# EAGLE board mrShark 02.a (EAGLE 5.10)
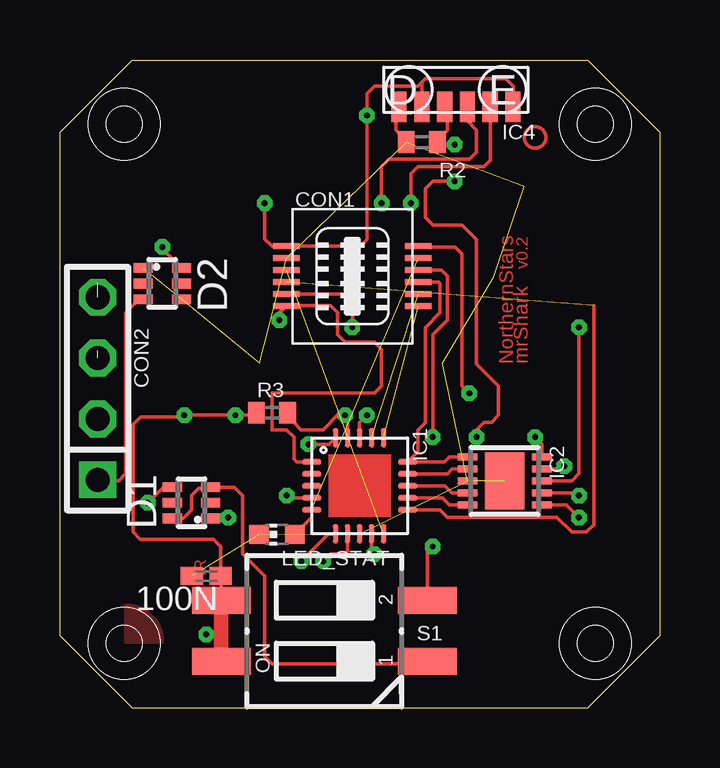
[diagram p0: board, top side]
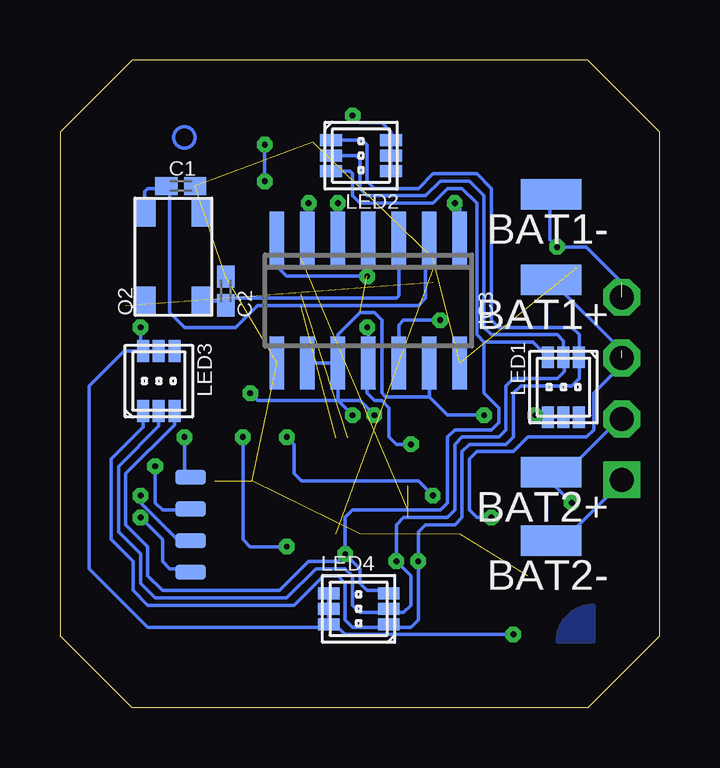
[diagram p1: board, bottom side, seen from below]

Size 25 x 27 mm. Coordinates in mm from the lower left corner, seen from the top.
Outline: 3,0 22,0 25,3 25,24 22,27 3,27 0,24 0,3 3,0
Copper layers (1*16): Top 0.035mm / dielectric 1.5mm / Bottom 0.035mm
Design rules "default": minimum track width 10mil, minimum drill 24mil, track to track 8mil, track to pad 8mil, pad to pad 8mil, via to via 8mil, smd to smd 8mil, copper to edge 40mil, drill to drill 8mil, minimum pad ring 10mil, minimum via ring 8mil, stop-mask expansion 4mil, vias tented up to drill 0mil, thermal gap 10mil

## Footprints (pad centres in the part's own frame; a part is rotated, then mirrored left to right if it is on the bottom)
C0402K = smd 0.925 x 0.74: 1 -0.6,0; 2 0.6,0
SMD1,27-2,54 = smd 1.27 x 2.54: 1 0,0
DF23C-12DS = smd 0.25 x 1.1: 1 -1.25,-2.75; 2 -0.75,-2.75; 3 -0.25,-2.75; 4 0.25,-2.75; 5 0.75,-2.75; 6 1.25,-2.75; 7 1.25,2.75; 8 0.75,2.75; 9 0.25,2.75; 10 -0.25,2.75; 11 -0.75,2.75; 12 -1.25,2.75
1X04 = drill 1.016 square: 1 -3.81,0 | drill 1.016 octagon: 2 -1.27,0; 3 1.27,0; 4 3.81,0
SOT363_PHILIPS = smd 0.4 x 0.8: 1 -0.65,-0.8; 2 0,-0.8; 3 0.65,-0.8; 4 0.65,0.8; 5 0,0.8; 6 -0.65,0.8
MLF20 = smd 0.8 x 0.23: P$1 -2,1; P$2 -2,0.5; P$3 -2,0; P$4 -2,-0.5; P$5 -2,-1; P$11 2,-1; P$12 2,-0.5; P$13 2,0; P$14 2,0.5; P$15 2,1 | smd 0.23 x 0.8: P$6 -1,-2; P$7 -0.5,-2; P$8 0,-2; P$9 0.5,-2; P$10 1,-2; P$16 1,2; P$17 0.5,2; P$18 0,2; P$19 -0.5,2; P$20 -1,2
DFN10-3X3 = smd 0.3 x 0.85: 1 -1,-1.55; 2 -0.5,-1.55; 3 0,-1.55; 4 0.5,-1.55; 5 1,-1.55; 6 1,1.55; 7 0.5,1.55; 8 0,1.55; 9 -0.5,1.55; 10 -1,1.55 | smd 2.38 x 1.65: EXP 0,0
SO-14 = smd 0.6 x 2.2: 1 -3.81,-2.6; 2 -2.54,-2.6; 3 -1.27,-2.6; 4 0,-2.6; 5 1.27,-2.6; 6 2.54,-2.6; 7 3.81,-2.6; 8 3.81,2.6; 9 2.54,2.6; 10 1.27,2.6; 11 0,2.6; 12 -1.27,2.6; 13 -2.54,2.6; 14 -3.81,2.6
TFBS4711 = smd 0.635 x 1.27: 1 -2.38,0.72; 2 -1.43,0.72; 3 -0.48,0.72; 4 0.47,0.72; 5 1.42,0.72; 6 2.37,0.72
PLCC6 = smd 0.9 x 0.5: 1 1.25,-0.65; 2 1.25,0; 3 1.25,0.65; 4 -1.25,0.65; 5 -1.25,0; 6 -1.25,-0.65
CHIP-LED0603 = smd 0.8 x 0.8: A 0,-0.75; C 0,0.75
SMD0,635-1,27 = smd 0.635 x 1.27: P$1 0,0
CFPX-104 = smd 1.2 x 0.9: P$1 -1.8,-1.2; P$2 1.9,1.2; P$3 -1.8,1.2; P$4 1.9,-1.2
R0402 = smd 0.7 x 0.9: 1 -0.65,0; 2 0.65,0
CTS-219-02 = smd 1.13 x 2.44: 1 -1.27,-4.3; 2 1.27,-4.3; 3 1.27,4.3; 4 -1.27,4.3

## Placement (x,y rotation side)
100N  18p  [C0402K]  6.1,5.49 180 top
BAT1+  [SMD1,27-2,54]  4.52,17.83 90 bottom
BAT1-  [SMD1,27-2,54]  4.52,21.39 90 bottom
BAT2+  [SMD1,27-2,54]  4.52,9.8 90 bottom
BAT2-  [SMD1,27-2,54]  4.52,6.96 90 bottom
C1  18p  [C0402K]  19.96,21.74 0 bottom
C2  18p  [C0402K]  18.08,17.37 90 bottom
CON1  DF-23C-12DS-0.5V  [DF23C-12DS]  12.19,17.98 270 top
CON2  SQT-104-01-L-S  [1X04]  1.57,13.3 90 top
D1  BAS70-07S  [SOT363_PHILIPS]  5.49,8.53 90 top
D2  BAS70-07S  [SOT363_PHILIPS]  4.27,17.68 270 top
H1  MOUNT-HOLE1,5  [1,5]  2.68,2.68 0 top
H2  MOUNT-HOLE1,5  [1,5]  22.32,2.68 0 top
H3  MOUNT-HOLE1,5  [1,5]  22.32,24.32 0 top
H4  MOUNT-HOLE1,5  [1,5]  2.68,24.32 0 top
IC1  TINY4313MU  [MLF20]  12.5,9.25 0 top
IC2  A3901  [DFN10-3X3]  18.54,9.45 270 top
IC3  MCP2120-I/SL  [SO-14]  12.14,16.97 180 bottom
IC4  TFBS4711-TR1  [TFBS4711]  16.51,25.76 180 top
LED1  ASMT-YTD2-0BB02  [PLCC6]  4.01,13.36 90 bottom
LED2  ASMT-YTD2-0BB02  [PLCC6]  12.45,23.01 180 bottom
LED3  ASMT-YTD2-0BB02  [PLCC6]  20.88,13.61 270 bottom
LED4  ASMT-YTD2-0BB02  [PLCC6]  12.55,4.11 0 bottom
LED_STAT  green  [CHIP-LED0603]  9.04,7.21 90 top
MOTOR_L+  [SMD0,635-1,27]  19.56,9.6 90 bottom
MOTOR_L-  [SMD0,635-1,27]  19.56,8.28 90 bottom
MOTOR_R+  [SMD0,635-1,27]  19.56,6.96 90 bottom
MOTOR_R-  [SMD0,635-1,27]  19.56,5.64 90 bottom
Q2  14.7456MHz  [CFPX-104]  20.27,18.75 90 bottom
R2  1k  [R0402]  15.09,23.57 0 top
R3  1k  [R0402]  8.84,12.29 0 top
S1  MCEMR-02-T  [CTS-219-02]  11.02,3.2 90 top

## Library data of the parts
100N C1 C2 R2 R3 = rcl
BAT1+ BAT1- BAT2+ BAT2- MOTOR_L+ MOTOR_L- MOTOR_R+ MOTOR_R- = wirepad
CON1 = con-hirose
CON2 = pinhead-2mm
D1 D2 = diode
H1-H4 = holes
IC1 = avr-6
IC2 = allegro
IC3 = microchip
IC4 = vishay
LED1-LED4 LED_STAT = led
Q2 = crystal
S1 = switch-dil

## Nets
AIN0: CON1.3 IC1.P$10
AIN1: CON1.4 IC1.P$11
BAT1+: BAT1+.1 CON2.3 D1.1
BAT1-: BAT1-.1 CON2.4 D2.6
BAT2+: BAT2+.1 CON2.2 D1.4
BAT2-: BAT2-.1 CON2.1 D2.3
GND: 100N.2 C1.2 C2.2 CON1.2 D2.1 D2.4 IC1.P$8 IC2.3 IC2.EXP IC3.8 IC3.14 IC4.6 LED_STAT.C R2.1
INT0: CON1.10 IC1.P$4
INT1: CON1.11 IC1.P$5
LED_B: IC1.P$6 LED1.1 LED2.1 LED3.1 LED4.1
LED_G: IC1.P$7 LED1.2 LED2.2 LED3.2 LED4.2
LED_R: IC1.P$9 LED1.3 LED2.3 LED3.3 LED4.3
LED_STAT: IC1.P$3 LED_STAT.A
MISO: CON1.7 IC1.P$16
MOSI/MOTOR_L_DIR: CON1.9 IC1.P$15 IC2.1
MOTOR_L+: IC2.10 MOTOR_L+.P$1
MOTOR_L-: IC2.9 MOTOR_L-.P$1
MOTOR_L_PWM: IC1.P$14 IC2.2
MOTOR_R+: IC2.7 MOTOR_R+.P$1
MOTOR_R-: IC2.6 MOTOR_R-.P$1
MOTOR_R_DIR: IC1.P$12 IC2.5
MOTOR_R_PWM: IC1.P$13 IC2.4
N$1: C2.1 IC3.3 Q2.P$1
N$2: C1.1 IC3.2 Q2.P$2
RESET: CON1.12 IC1.P$19 R3.2
RXD: CON1.5 IC1.P$20 IC3.11
RXIR: IC3.5 IC4.3
SCK: CON1.8 IC1.P$17
T_IR: IC4.4 R2.2 S1.2
TXD: CON1.6 IC1.P$1 IC3.12
TXIR: IC3.6 IC4.2
VBAT: D1.3 D1.6 S1.1
VCC: 100N.1 CON1.1 IC1.P$18 IC2.8 IC3.1 IC3.4 IC3.7 IC3.9 IC3.10 IC3.13 IC4.1 IC4.5 LED1.4 LED1.5 LED1.6 LED2.4 LED2.5 LED2.6 LED3.4 LED3.5 LED3.6 LED4.4 LED4.5 LED4.6 R3.1 S1.3 S1.4

## Tracks (layer width: path | path; a pad name or v marks a point on that pad's centre or on a via)
AIN0  (1 unrouted)
AIN1  (1 unrouted)
  Top 0.152: IC1.P$11 15.83,8.25 16.15,7.92 20.73,7.92 21.34,7.32 21.95,7.32 22.25,7.62 22.25,16.76
BAT1+  (via drill 0.24 pad 0.41)  (1 unrouted)
  Top 0.152: 5.72,7.92 D1.1 6.33,7.92 v7.01,7.92
  Bottom 0.152: 1.57,14.88 BAT1+.1 | CON2.3 1.57,14.28 2.74,13.11 2.74,11.58 3.05,11.28 5.49,11.28 6.1,10.67 7.62,10.67 7.92,10.36 7.92,8.23 7.62,7.92 v7.01,7.92
BAT1-  (via drill 0.24 pad 0.41)  (1 unrouted)
  Top 0.152: v4.27,19.2 4.27,19.13 D2.6
  Bottom 0.152: 1.57,17.73 3.05,19.2 v4.27,19.2 4.57,19.51 4.57,21.34 BAT1-.1
BAT2+  (via drill 0.24 pad 0.41)
  Top 0.152: D1.4 4.31,9.18 v3.66,8.53
  Bottom 0.152: CON2.2 1.68,12.03 3.66,10.06 4.27,10.06 BAT2+.1 4.52,9.4 v3.66,8.53
BAT2-
  Top 0.152: D2.3 3.31,17.03 2.74,16.46 2.74,9.75 2.44,9.45 1.61,9.45 CON2.1
  Bottom 0.152: CON2.1 1.57,9.4 3.66,7.32 4.17,7.32 BAT2-.1
GND  (12 unrouted)
  Top 0.152: R2.1 14.44,23.66 14.02,24.08 14.02,24.92 IC4.6
INT0  (via drill 0.24 pad 0.41)
  Top 0.152: CON1.10 15.9,18.23 16.15,17.98 16.15,16.15 15.54,15.54 v15.54,11.28 | IC1.P$4 9.54,8.75 v9.45,8.84
  Bottom 0.152: v9.45,8.84 10.06,9.45 14.94,9.45 15.24,9.75 15.24,10.97 v15.54,11.28
INT1  (1 unrouted)
LED_B  (via drill 0.24 pad 0.41)
  Top 0.152: IC1.P$6 11.21,7.25 v10.06,6.1
  Bottom 0.152: LED2.1 12.38,23.66 12.19,23.47 12.19,21.95 11.89,21.64 10.06,21.64 9.45,22.25 7.62,22.25 7.01,21.64 7.01,16.15 6.71,15.85 3.66,15.85 3.35,15.54 LED1.1 | LED1.1 | LED1.1 3.35,13.72 3.66,13.41 5.79,13.41 6.1,13.11 6.1,11.28 6.4,10.97 7.92,10.97 8.23,10.67 8.23,7.92 8.53,7.62 9.75,7.62 10.06,7.32 v10.06,6.1 10.06,3.66 10.36,3.35 11.19,3.35 LED4.1 11.41,3.35 12.8,3.35 13.11,3.66 13.11,5.18 13.41,5.49 14.02,5.49 15.24,4.27 21.34,4.27 21.95,4.88 21.95,6.1 22.86,7.01 22.86,10.36 21.53,11.69 LED3.1
LED_G  (via drill 0.24 pad 0.41)
  Top 0.152: IC1.P$7 12,6.51 11.89,6.4 11.28,6.4 v10.97,6.1
  Bottom 0.152: LED3.2 20.88,11.73 22.55,10.06 22.55,7.32 21.64,6.4 21.64,5.18 21.03,4.57 15.54,4.57 14.33,5.79 13.11,5.79 12.8,5.49 12.8,4.27 12.5,3.96 11.45,3.96 LED4.2 11.14,3.96 10.67,3.96 10.36,4.27 10.36,5.49 v10.97,6.1 10.97,7.62 10.67,7.92 8.84,7.92 8.53,8.23 8.53,10.97 8.23,11.28 6.71,11.28 6.4,11.58 6.4,13.41 6.1,13.72 4.27,13.72 3.96,14.02 3.96,14.63 3.98,14.61 LED1.2 4,15.28 4.27,15.54 7.01,15.54 7.32,15.85 7.32,21.34 7.92,21.95 9.14,21.95 9.75,21.34 12.19,21.34 12.5,21.64 12.5,22.86 12.65,23.01 LED2.2
LED_R  (via drill 0.24 pad 0.41)
  Top 0.152: IC1.P$9 13,6.51 v13.11,6.4
  Bottom 0.152: LED3.3 20.23,11.78 22.25,9.75 22.25,7.62 21.34,6.71 21.34,5.49 20.73,4.88 15.85,4.88 14.63,6.1 13.41,6.1 v13.11,6.4 | v13.11,6.4 12.5,5.79 12.5,5.18 12.19,4.88 11.41,4.88 LED4.3 | LED2.3 12.91,22.36 12.8,22.25 12.8,21.34 12.5,21.03 9.45,21.03 8.84,21.64 8.23,21.64 7.62,21.03 7.62,15.54 7.32,15.24 | 7.32,15.24 5.29,15.24 LED1.3 | 7.32,15.24 7.32,13.11 6.71,12.5 6.71,11.89 7.01,11.58 8.53,11.58 8.84,11.28 8.84,8.53 9.14,8.23 12.8,8.23 13.11,7.92 v13.11,6.4
LED_STAT  (1 unrouted)
  Top 0.152: LED_STAT.A 10.5,7.92
MARK1
  pour Top: 2.74,2.74 2.74,4.27 arc-90 4.27,2.74
MARK2
  pour Bottom: 2.74,2.74 2.74,4.27 arc-90 4.27,2.74
MISO  (1 unrouted)
MOSI/MOTOR_L_DIR
  Top 0.152: CON1.9 15.79,17.73 15.85,17.68 15.85,16.46 15.24,15.85 15.24,11.89 14.94,11.58 14.94,10.68 IC1.P$15 16.04,10.25 16.24,10.45 IC2.1
MOTOR_L+  (via drill 0.24 pad 0.41)
  Top 0.152: IC2.10 20.09,11 v19.81,11.28
  Bottom 0.152: v19.81,11.28 19.81,9.86 MOTOR_L+.P$1
MOTOR_L-  (via drill 0.24 pad 0.41)
  Top 0.152: IC2.9 20.92,9.95 v21.03,10.06
  Bottom 0.152: v21.03,10.06 21.03,8.53 20.73,8.23 19.61,8.23 MOTOR_L-.P$1
MOTOR_L_PWM
  Top 0.152: IC1.P$14 16.15,9.75 16.35,9.95 IC2.2
MOTOR_R+  (via drill 0.24 pad 0.41)
  Top 0.152: IC2.7 21.53,8.95 v21.64,8.84
  Bottom 0.152: v21.64,8.84 21.64,8.53 20.12,7.01 19.61,7.01 MOTOR_R+.P$1
MOTOR_R-  (via drill 0.24 pad 0.41)
  Top 0.152: IC2.6 21.12,8.45 v21.64,7.92
  Bottom 0.152: v21.64,7.92 20.73,7.01 20.73,6.1 20.42,5.79 19.71,5.79 MOTOR_R-.P$1 19.71,5.49
MOTOR_R_DIR
  Top 0.152: IC1.P$12 15.94,8.75 16.24,8.45 IC2.5
MOTOR_R_PWM
  Top 0.152: IC1.P$13 16.05,9.25 16.35,8.95 IC2.4
N$1
  Bottom 0.152: Q2.P$1 18.26,16.95 C2.1 | C2.1 | IC3.3 10.87,17.17 10.97,17.07 17.79,17.07 C2.1
N$2
  Bottom 0.152: Q2.P$2 21.47,21.51 21.34,21.64 20.67,21.64 C1.1 20.52,21.74 20.42,21.64 20.42,16.46 19.81,15.85 17.68,15.85 16.76,16.76 10.06,16.76 9.75,17.07 9.75,19.41 IC3.2
RESET  (via drill 0.24 pad 0.41)
  Top 0.152: IC1.P$19 12,12.08 v11.89,12.19 11.58,12.19 10.97,11.58 10.06,11.58 9.75,11.89 9.75,12.03 R3.2 | CON1.12 14.97,19.2 16.46,19.2 16.76,18.9 16.76,13.41 v17.07,13.11
  Bottom 0.152: v17.07,13.11 16.76,12.8 12.5,12.8 v11.89,12.19
RXD  (via drill 0.24 pad 0.41)
  Top 0.152: v12.19,15.85 12.19,17.07 12.03,17.23 CON1.5 | v10.36,10.97 11.22,10.97 IC1.P$20
  Bottom 0.152: IC3.11 12.14,13.97 | IC3.11 12.19,14.32 12.19,13.11 11.89,12.8 11.58,12.8 11.28,12.5 11.28,11.28 10.97,10.97 v10.36,10.97 | IC3.11 12.14,15.8 v12.19,15.85
RXIR  (via drill 0.24 pad 0.41)
  Top 0.152: v13.41,21.03 13.41,22.55 13.72,22.86 17.07,22.86 17.37,23.16 17.37,24.08 16.99,24.46 IC4.3
  Bottom 0.152: IC3.5 v13.41,21.03
SCK  (1 unrouted)
T_IR  (via drill 0.24 pad 0.41)
  Top 0.152: IC4.4 16.15,24.92 16.15,24.08 15.74,23.66 R2.2 15.84,23.47 v16.46,23.47 | S1.2 15.32,6.48 v15.54,6.71 | v16.46,21.95 15.54,21.95 15.24,21.64 15.24,20.42 15.54,20.12 16.76,20.12 17.37,19.51 17.37,14.33 18.29,13.41 18.29,12.19 17.98,11.89 17.68,11.89 17.37,11.58 v17.37,11.28
  Bottom 0.152: v16.46,21.95 v16.46,23.47 | 17.37,10.97 v17.37,11.28 17.37,7.01 17.07,6.71 v15.54,6.71
TXD  (via drill 0.24 pad 0.41)
  Top 0.152: CON1.6 9.42,16.73 9.14,16.46 v9.14,16.15 9.14,16.43 CON1.6 | CON1.6 9.47,16.76 11.28,16.76 11.58,16.46 11.58,15.54 11.89,15.24 13.11,15.24 13.41,14.94 13.41,13.41 13.11,13.11 8.84,13.11 8.84,11.58 9.45,11.58 9.75,11.28 9.75,10.36 9.87,10.25 IC1.P$1
  Bottom 0.152: IC3.12 10.87,15.95 10.67,16.15 v9.14,16.15
TXIR  (via drill 0.24 pad 0.41)
  Top 0.152: IC4.2 17.94,22.82 17.68,22.55 14.94,22.55 14.63,22.25 v14.63,21.03
  Bottom 0.152: v14.63,21.03 14.63,19.62 IC3.6
VBAT
  Top 0.152: D1.6 5.14,7.88 5.49,8.23 5.49,8.84 5.79,9.14 6.25,9.14 D1.3 7.28,9.18 7.62,8.84 7.62,6.4 8.53,5.49 8.53,2.13 8.84,1.83 15.22,1.83 S1.1
VCC  (via drill 0.24 pad 0.41)  (1 unrouted)
  Top 0.152: 15.09,26.06 IC4.5 | 15.09,26.06 15.24,26.21 18.59,26.21 18.9,25.91 IC4.1 | S1.4 6.71,1.91 | v8.53,21.03 8.53,19.54 8.84,19.23 CON1.1 11.86,19.23 12.19,18.9 | S1.3 6.72,5.46 100N.1 6.7,6.71 6.4,7.01 3.35,7.01 3.05,7.32 3.05,11.8 LED1.6 5.1,12.11 v5.18,12.19 v7.32,12.19 8.09,12.19 R3.1 | 12.19,18.9 v12.19,17.98 | 15.09,26.06 14.94,25.91 13.11,25.91 12.8,25.6 v12.8,24.69 12.8,19.51 12.19,18.9 | v12.8,12.19 12.5,11.89 IC1.P$18 | v6.1,3.05 6.42,3.05 6.72,2.74 | IC2.8 21.34,9.45 21.64,9.75 v21.64,15.85
  Top 0.61: S1.4 6.72,2.74 S1.3
  Bottom 0.152: IC3.1 8.33,20.83 v8.53,21.03 | LED1.6 LED1.5 LED1.4 5.1,12.11 v5.18,12.19 | LED2.4 LED2.5 LED2.6 11.2,24 11.58,24.38 12.5,24.38 v12.8,24.69 | IC3.4 12.19,19.52 v12.19,17.98 15.54,17.98 15.85,18.29 15.85,19.47 IC3.7 | 9.6,12.95 IC3.13 | 9.6,12.95 8.84,12.19 v7.32,12.19 | IC3.10 IC3.9 | IC3.10 13.41,12.8 v12.8,12.19 | 9.6,12.95 11.43,12.95 11.58,13.11 11.58,16.15 11.89,16.46 12.5,16.46 13.41,15.54 IC3.10 | v6.1,3.05 13.11,3.05 13.8,3.74 LED4.4 LED4.5 LED4.6 13.91,3.35 21.34,3.35 23.77,5.79 23.77,13.41 22.32,14.86 LED3.4 LED3.5 LED3.6 21.64,14.98 v21.64,15.85
(copper drawn outside any net)
  shapes: Bottom circle x1, Top circle x1

## Text on the board
Top: v0.2 | NorthernStars | mrShark | IR